# EAGLE board DUE_MUSICAL_ROBOTS (EAGLE 6.1)
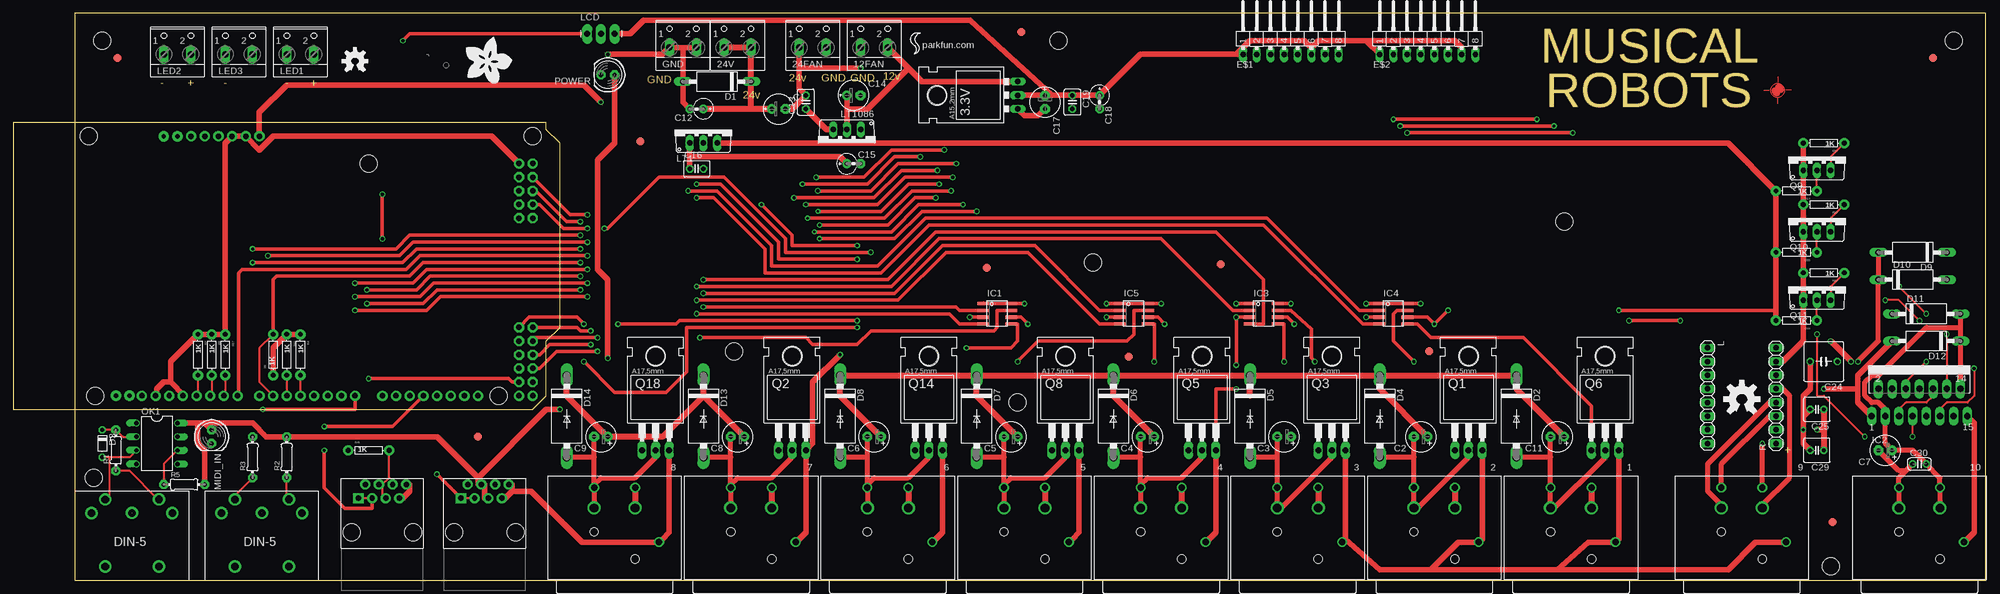
[diagram p0: board, top side]
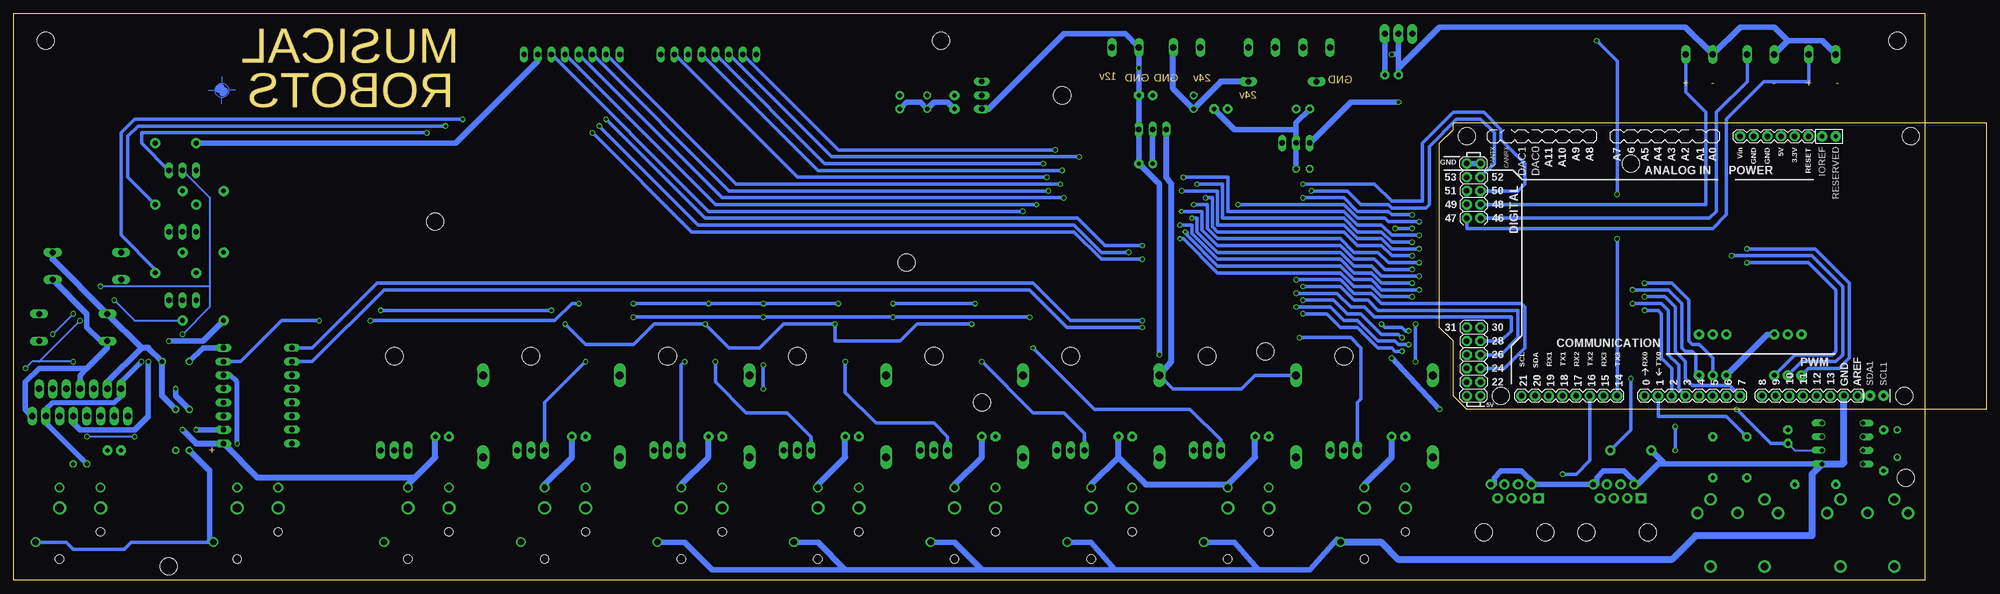
[diagram p1: board, bottom side, seen from below]

Size 366.71 x 105.4 mm. Coordinates in mm from the lower left corner, seen from the top.
Outline: 366.7,0 366.7,105.4 11.43,105.4 11.43,0 366.71,0
Copper layers (1*16): Top 0.035mm / dielectric 1.5mm / Bottom 0.035mm
Design rules: minimum track width 10mil, minimum drill 24mil, track to track 8mil, track to pad 8mil, pad to pad 8mil, via to via 8mil, smd to smd 8mil, copper to edge 40mil, drill to drill 8mil, minimum pad ring 10mil, minimum via ring 8mil, stop-mask expansion 4mil, vias tented up to drill 0mil, thermal gap 10mil
Net classes: 0 Signal: width 0.406 mm; 1 Power: width 1.016 mm; 2 Motor/Sol: width 0.889 mm; 3 24v: width 1.143 mm
Holes 3.2 mm at 14.92,19.05 16.51,100.33 337.82,2.54 360.68,100.33 194.31,100.33 186.69,33.02 200.66,59.05 133.99,42.55 288.29,66.67

## Footprints (pad centres in the part's own frame; a part is rotated, then mirrored left to right if it is on the bottom)
NC4FAH-0 = drill 1.2: 1 -3.81,0.55; 4 3.81,0.55; G -8.25,10.72 | drill 1.6: 2 -3.81,4.365; 3 3.81,4.365 | hole 1.6: -3.81,13.89; 3.81,8.81
78XXL = drill 1.016 long: GND 0,-3.81; IN -2.54,-3.81; OUT 2.54,-3.81 | hole 3.302: 0,11.176
W237-102 = drill 1.194 long: 1 -2.5,-1.27; 2 2.5,-1.27
E2,5-6E = drill 0.813 pad 1.778: + -1.27,0 | drill 0.813 pad 1.778 octagon: - 1.27,0
E2,5-6 = drill 0.813 pad 1.778: + -1.27,0 | drill 0.813 pad 1.778 octagon: - 1.27,0
E2,5-4R = drill 0.813 pad 1.6: + -1.27,0 | drill 0.813 pad 1.6 octagon: - 1.27,0
C025-030X050 = drill 0.813 pad 1.422 octagon: 1 -1.27,0; 2 1.27,0
C050-075X075 = drill 0.813 octagon: 1 -2.54,0; 2 2.54,0
C025-050X050 = drill 0.813 octagon: 1 -1.27,0; 2 1.27,0
C025-024X044 = drill 0.813 octagon: 1 -1.27,0; 2 1.27,0
DO15-12 = drill 1.118 long: A 6.35,0; C -6.35,0
DO201-15 = drill 1.499 long: A 7.62,0; C -7.62,0
D-5 = drill 0.813 octagon: A 2.54,0; C -2.54,0
MA08-1W = drill 1.016 long: 1 -8.89,0; 2 -6.35,0; 3 -3.81,0; 4 -1.27,0; 5 1.27,0; 6 3.81,0; 7 6.35,0; 8 8.89,0
FIDUCIAL-1.5X3 = smd 1.5 x 1.5: 1 0,0
SOIC-8 = smd 0.6 x 2.2: 1 -1.905,-2.6; 2 -0.635,-2.6; 3 0.635,-2.6; 4 1.905,-2.6; 5 1.905,2.6; 6 0.635,2.6; 7 -0.635,2.6; 8 -1.905,2.6
MULTIWATT-15 = drill 1.2 long: 1 -8.89,-7.62; 2 -7.62,-2.54; 3 -6.35,-7.62; 4 -5.08,-2.54; 5 -3.81,-7.62; 6 -2.54,-2.54; 7 -1.27,-7.62; 8 0,-2.54; 9 1.27,-7.62; 10 2.54,-2.54; 11 3.81,-7.62; 12 5.08,-2.54; 13 6.35,-7.62; 14 7.62,-2.54; 15 8.89,-7.62
RJ45-8 = drill 1 pad 1.88 square: 1 -4.445,6.35 | drill 1 pad 1.88: 2 -3.175,8.89; 3 -1.905,6.35; 4 -0.635,8.89; 5 0.635,6.35; 6 1.905,8.89; 7 3.175,6.35; 8 4.445,8.89 | hole 3.2: -5.715,0; 5.715,0
1X08 = drill 1.016 long: 1 -8.89,0; 2 -6.35,0; 3 -3.81,0; 4 -1.27,0; 5 1.27,0; 6 3.81,0; 7 6.35,0; 8 8.89,0
1X03_LONGPADS = drill 1.118 pad 1.88 long: 1 0,0; 2 2.54,0; 3 5.08,0
TO220V = drill 1.016 long: 1 -2.54,-2.54; 2 0,-2.54; 3 2.54,-2.54
LED5MM = drill 0.813 pad 1.676 octagon: A -1.27,0; K 1.27,0
DIN_5_FEMALE_SUPPORT = drill 1.4 pad 2.286: 1 0.46,3.61; 2 -7.07,3.6; 3 7.94,3.6; 4 -4.53,6.12; 5 5.47,6.13; 6 -4.53,-6.382; 7 5.478,-6.382
DIL08 = drill 0.813 offset: 1 -3.81,-3.81; 2 -1.27,-3.81; 3 1.27,-3.81; 4 3.81,-3.81; 5 3.81,3.81; 6 1.27,3.81; 7 -1.27,3.81; 8 -3.81,3.81
TO220 = drill 1.118 long: 1 -2.54,-6.35; 2 0,-6.35; 3 2.54,-6.35 | hole 3.302: 0,11.176
0204/7 = drill 0.813 pad 1.676 octagon: 1 -3.81,0; 2 3.81,0
AXIAL-0.3 = drill 0.9 pad 1.88: P$1 -3.81,0; P$2 3.81,0
ARDUINO_MEGA = drill 1.016 pad 1.88: 0 63.5,50.8; 1 60.96,50.8; 2 58.42,50.8; 3 55.88,50.8; 3.3V 35.56,2.54; 4 53.34,50.8; 5 50.8,50.8; 5V@0 38.1,2.54; 5V@1 93.98,50.8; 5V@2 96.52,50.8; 6 48.26,50.8; 7 45.72,50.8; 8 41.656,50.8; 9 39.116,50.8; 10 36.576,50.8; 11 34.036,50.8; 12 31.496,50.8; 13 28.956,50.8; 14 68.58,50.8; 15 71.12,50.8; 16 73.66,50.8; 17 76.2,50.8; 18 78.74,50.8; 19 81.28,50.8; 20 83.82,50.8; 21 86.36,50.8; AREF 23.876,50.8; GND@0 40.64,2.54; GND@1 43.18,2.54; GND@2 93.98,7.62; GND@3 96.52,7.62; GND@4 26.416,50.8; RESET 33.02,2.54; VIN 45.72,2.54 | drill 1.016 pad 1.88 octagon: 22 93.98,48.26; 23 96.52,48.26; 24 93.98,45.72; 25 96.52,45.72; 26 93.98,43.18; 27 96.52,43.18; 28 93.98,40.64; 29 96.52,40.64; 30 93.98,38.1; 31 96.52,38.1; 46 93.98,17.78; 47 96.52,17.78; 48 93.98,15.24; 49 96.52,15.24; 50 93.98,12.7; 51 96.52,12.7; 52 93.98,10.16; 53 96.52,10.16 | drill 0.8 pad 1.93: IOREF 30.48,2.54; P$2 27.94,2.54; SCL1 19.05,50.8; SDA1 21.59,50.8 | hole 3.2: 15.24,50.8; 13.97,2.54; 66.04,7.62; 90.17,50.8; 96.52,2.54

## Placement (x,y rotation side)
1  NC4FAH-0  [NC4FAH-0]  289.56,17.78 180 top
2  NC4FAH-0  [NC4FAH-0]  264.16,17.78 180 top
3  NC4FAH-0  [NC4FAH-0]  238.76,17.78 180 top
3.3V  V_REG_LD1117VXX  [78XXL]  182.88,90.17 90 top
4  NC4FAH-0  [NC4FAH-0]  213.36,17.78 180 top
5  NC4FAH-0  [NC4FAH-0]  187.96,17.78 180 top
6  NC4FAH-0  [NC4FAH-0]  162.56,17.78 180 top
7  NC4FAH-0  [NC4FAH-0]  137.16,17.78 180 top
8  NC4FAH-0  [NC4FAH-0]  111.76,17.78 180 top
9  NC4FAH-0  [NC4FAH-0]  321.31,17.78 180 top
10  NC4FAH-0  [NC4FAH-0]  354.33,17.78 180 top
12FAN  [W237-102]  160.02,100.33 0 top
24FAN  [W237-102]  148.59,100.33 0 top
24V  [W237-102]  134.62,100.33 0 top
C1  [E2,5-6E]  142.24,87.63 0 top
C2  [E2,5-6]  261.62,26.67 180 top
C3  [E2,5-6]  236.22,26.67 180 top
C4  [E2,5-6]  210.82,26.67 180 top
C5  [E2,5-6]  185.42,26.67 180 top
C6  [E2,5-6]  160.02,26.67 180 top
C7  [E2,5-6]  347.98,24.13 180 top
C8  [E2,5-6]  134.62,26.67 180 top
C9  [E2,5-6]  109.22,26.67 180 top
C11  [E2,5-6]  287.02,26.67 180 top
C12  [E2,5-4R]  127,87.63 180 top
C13  [C025-030X050]  147.32,88.9 90 top
C14  [E2,5-6E]  156.21,90.17 0 top
C15  [E2,5-4R]  156.21,77.47 0 top
C16  [C025-030X050]  127,76.52 0 top
C17  [E2,5-6E]  191.77,88.9 270 top
C18  [E2,5-4R]  201.93,88.9 270 top
C19  [C025-030X050]  196.85,88.9 270 top
C24  50uf  [C050-075X075]  336.55,40.64 180 top
C25  1uf  [C025-050X050]  335.28,31.75 180 top
C29  1uf  [C025-050X050]  335.28,24.13 180 top
C30  [C025-024X044]  354.33,21.59 0 top
D1  1N5060GP  [DO15-12]  130.81,92.71 180 top
D2  1N5400  [DO201-15]  279.4,30.48 270 top
D3  1N4004  [D-5]  16.51,25.4 270 top
D4  1N5400  [DO201-15]  254,30.48 270 top
D5  1N5400  [DO201-15]  229.87,30.48 270 top
D6  1N5400  [DO201-15]  204.47,30.48 270 top
D7  1N5400  [DO201-15]  179.07,30.48 270 top
D8  1N5400  [DO201-15]  153.67,30.48 270 top
D9  1N5060GP  [DO15-12]  353.06,60.96 180 top
D10  1N5060GP  [DO15-12]  353.06,55.88 0 top
D11  1N5060GP  [DO15-12]  355.6,49.53 0 top
D12  1N5060GP  [DO15-12]  355.6,44.45 180 top
D13  1N5400  [DO201-15]  128.27,30.48 270 top
D14  1N5400  [DO201-15]  102.87,30.48 270 top
E$1  [MA08-1W]  237.49,97.79 0 top
E$2  [MA08-1W]  262.89,97.79 0 top
E$3  [LOGO]  73.03,95.25 0 top
E$4  [PASS-ROUND]  327.98,91.12 0 top
E$5  [FIDUCIAL-1.5X3]  356.87,97.16 0 top
E$6  [FIDUCIAL-1.5X3]  338.14,10.79 0 top
E$7  [FIDUCIAL-1.5X3]  19.37,97.16 0 top
E$8  [FIDUCIAL-1.5X3]  86.36,26.67 0 top
E$9  [FIDUCIAL-1.5X3]  180.97,58.1 0 top
E$10  [FIDUCIAL-1.5X3]  207.33,41.59 0 top
E$11  [FIDUCIAL-1.5X3]  224.47,58.74 0 top
E$12  [FIDUCIAL-1.5X3]  263.21,42.55 0 top
E$13  [FIDUCIAL-1.5X3]  116.52,81.6 0 top
E$14  [FIDUCIAL-1.5X3]  187.33,101.92 0 top
E$15  [OSHW-LOGO-L]  321.31,33.66 0 top
E$18  [ADAFRUIT450MIL]  84.14,92.39 0 top
GND  [W237-102]  124.46,100.33 0 top
IC1  UCC27524  [SOIC-8]  182.88,49.53 270 top
IC2  L298  [MULTIWATT-15]  354.33,38.1 0 top
IC3  UCC27524  [SOIC-8]  232.41,49.53 270 top
IC4  UCC27524  [SOIC-8]  256.54,49.53 270 top
IC5  UCC27524  [SOIC-8]  208.28,49.53 270 top
IN  RJ45-8PTH  [RJ45-8]  68.58,8.89 0 top
JP5  LOGO-SFEM  [SFE-LOGO]  167.64,97.79 0 top
L  [1X08]  314.96,34.29 270 top
LCD  [1X03_LONGPADS]  106.68,101.6 0 top
LED1  [W237-102]  53.34,99.06 0 top
LED2  [W237-102]  30.48,99.06 0 top
LED3  [W237-102]  41.91,99.06 0 top
LT1  5V REG  [TO220V]  128.27,83.82 0 top
LT1086  12V REG  [TO220V]  154.94,81.28 180 top
MIDI_IN  [LED5MM]  36.83,26.67 270 top
MIN  MIDI_CONN_FEMALE_SUPPORT  [DIN_5_FEMALE_SUPPORT]  21.59,8.89 0 top
MOUT  MIDI_CONN_FEMALE_SUPPORT  [DIN_5_FEMALE_SUPPORT]  45.72,8.89 0 top
OK1  6N138  [DIL08]  26.67,25.4 270 top
OUT  RJ45-8PTH  [RJ45-8]  87.63,8.89 0 top
POWER  [LED5MM]  110.49,93.98 180 top
Q1  IRF540  [TO220]  270.51,30.48 0 top
Q2  IRF540  [TO220]  144.78,30.48 0 top
Q3  IRF540  [TO220]  245.11,30.48 0 top
Q5  IRF540  [TO220]  220.98,30.48 0 top
Q6  IRF540  [TO220]  295.91,30.48 0 top
Q8  IRF540  [TO220]  195.58,30.48 0 top
Q9  [TO220V]  335.28,78.74 0 top
Q10  [TO220V]  335.28,67.31 0 top
Q11  [TO220V]  335.28,54.61 0 top
Q14  IRF540  [TO220]  170.18,30.48 0 top
Q18  IRF540  [TO220]  119.38,30.48 0 top
R  [1X08]  327.66,34.29 90 top
R1  220  [0204/7]  19.05,24.13 90 top
R2  47  [0204/7]  50.8,22.86 90 top
R3  47  [0204/7]  44.45,22.86 90 top
R4  1K  [AXIAL-0.3]  53.34,41.91 270 top
R5  100  [0204/7]  31.75,17.78 0 top
R7  1K  [AXIAL-0.3]  34.29,41.91 270 top
R8  1K  [AXIAL-0.3]  36.83,41.91 270 top
R9  1K  [AXIAL-0.3]  48.26,41.91 90 top
R10  1K  [AXIAL-0.3]  50.8,41.91 270 top
R11  1K  [AXIAL-0.3]  336.55,81.28 180 top
R12  1K  [AXIAL-0.3]  336.55,69.85 180 top
R13  1K  [AXIAL-0.3]  336.55,57.15 180 top
R14  1K  [AXIAL-0.3]  331.47,72.39 180 top
R15  1K  [AXIAL-0.3]  331.47,60.96 180 top
R16  1K  [AXIAL-0.3]  331.47,48.26 180 top
R17  1K  [AXIAL-0.3]  39.37,41.91 270 top
R41  1K  [AXIAL-0.3]  66.04,24.13 0 top
U1  ARDUINO-MEGAFULL  [ARDUINO_MEGA]  0,85.09 180 bottom
U$3  OSHW-LOGOM  [OSHW-LOGO-M]  63.5,96.52 0 top

## Library data of the parts
1-10 = con-neutrik_ag; MPN: NC4FAH-0; OC_FARNELL: unknown; OC_NEWARK: 45K1611
3.3V IN JP5 LCD OUT U1 U$3 = Due
12FAN 24FAN 24V GND LED1-LED3 = con-wago-500; MPN: 237-102; OC_FARNELL: unknown; OC_NEWARK: 70K9898
C1-C9 C11-C19 C25 C29 E$18 MIDI_IN POWER Q9-Q11 R1-R3 R5 = adafruit
C24 C30 = rcl
D1-D14 = diode
E$1 E$2 = con-lstb
E$3 = atmel
E$4 = marks
E$5-E$15 = SparkFun-Aesthetics
IC1 IC3-IC5 = dp_devices
IC2 = st-microelectronics; MPN: L298N; OC_FARNELL: 1589425; OC_NEWARK: 32M1527
L R = pinhead
LT1 LT1086 = linear
MIN MOUT = SparkFun-Connectors
OK1 = optocoupler; MF: VISHAY/TELEFUNKEN; MPN: 6N138; OC_FARNELL: 9860150; OC_NEWARK: 35K5294
Q1-Q3 Q5 Q6 Q8 Q14 Q18 = transistor-fet
R4 R7-R17 R41 = SparkFun

## Nets
+3V3 [Power]: 3.3V.GND C17.+ C18.+ C19.1 E$1.1 E$1.6 E$2.1 E$2.7 LCD.3 MIDI_IN.A OK1.8 OUT.4 OUT.5 POWER.A Q9.1 Q10.1 Q11.1 R2.2 R5.2 R11.P$2 R12.P$2 R13.P$2 R.7
+5V [Power]: IC2.9 LT1.3 R14.P$2 R15.P$2 R16.P$2
+12V [Power]: 3.3V.OUT 12FAN.2 C14.+ C15.+ C16.1 LT1.1 LT1086.2 U1.VIN
+24V [24v]: 1.1 1.2 2.1 2.2 4.1 4.2 5.1 5.2 6.1 6.2 7.1 7.2 8.1 8.2 24FAN.2 24V.1 24V.2 C1.+ C2.+ C4.+ C5.+ C6.+ C8.+ C9.+ C11.+ C12.+ C13.1 C24.1 C25.1 C29.1 D1.C D2.C D4.C D5.C D6.C D7.C D8.C D9.C D11.C D13.C D14.C IC2.4 LT1086.3 R.1
DIGITALBUS8: U1.52
DIGITALBUS9: Q11.3 R13.P$1 U1.51
DIGITALBUS11: Q9.3 R11.P$1 U1.50
GND [Power]: 1.G 2.G 3.3V.IN 3.G 4.G 5.G 6.G 7.G 8.G 9.G 10.G 12FAN.1 24FAN.1 C1.- C12.- C13.2 C14.- C15.- C16.2 C17.- C18.- C19.2 C24.2 C25.2 C29.2 D1.A D10.A D12.A GND.1 GND.2 IC2.1 IC2.8 IC2.15 IC3.3 IN.2 IN.7 IN.8 LCD.2 LED1.1 LED2.1 LED3.1 LT1.2 LT1086.1 OK1.5 OUT.2 OUT.7 OUT.8 POWER.K Q1.3 Q3.3 Q5.3 Q6.3 Q8.3 Q14.3 Q18.3 R4.P$1 R7.P$1 R8.P$1 R9.P$1 R10.P$1 R17.P$1 R41.P$1 R.2 R.8 U1.12 U1.GND@0 U1.GND@1 U1.GND@2 U1.GND@3 U1.GND@4
MIDIIN: MIDI_IN.K OK1.6 R5.1 U1.0
MIDIOUT: R3.2 U1.1
N$1: MIN.5 R1.1
N$2: D3.C OK1.2 R1.2
N$3 [Motor/Sol]: 2.3 2.4 C2.- D4.A Q1.2
N$5: D3.A MIN.4 OK1.3
N$6: MOUT.5 R2.1
N$7 [Motor/Sol]: 10.1 10.2 C7.+ C30.2 D11.A D12.C IC2.3 IC2.14
N$8: MOUT.4 R3.1
N$9: OUT.1 OUT.3 U1.16
N$10: IN.1 IN.3 U1.17
N$13 [Motor/Sol]: 3.3 3.4 C3.- D5.A Q3.2
N$14: IN.4 IN.5 R41.P$2 U1.22
N$16 [Motor/Sol]: 1.3 1.4 C11.- D2.A Q6.2
N$17: E$2.6 U1.2
N$18: IC2.7 IC2.12 Q9.2 R14.P$1
N$19: E$2.3 R4.P$2 U1.4
N$20: LCD.1 U1.14
N$21: E$1.7 R9.P$2 U1.6
N$22 [Motor/Sol]: 9.1 R.6
N$23 [Motor/Sol]: 9.3 R.4
N$25: Q10.3 R12.P$1 U1.49
N$26 [Motor/Sol]: 9.4 R.3
N$27 [Motor/Sol]: 9.2 R.5
N$28 [Motor/Sol]: 10.3 10.4 C7.- C30.1 D9.A D10.C IC2.2 IC2.13
N$30: IC2.6 IC2.11 Q11.2 R16.P$1
N$31: IC2.5 IC2.10
N$32: E$1.2 R7.P$2 U1.11
N$33: E$2.4 U1.7
N$34: E$1.5 U1.8
N$35: E$1.3 R8.P$2 U1.10
N$40 [Motor/Sol]: 4.3 4.4 C4.- D6.A Q5.2
N$43: Q10.2 R15.P$1
N$44 [Motor/Sol]: 5.3 5.4 C5.- D7.A Q8.2
N$47 [Motor/Sol]: 6.3 6.4 C6.- D8.A Q14.2
N$50 [Motor/Sol]: 7.3 7.4 C8.- D13.A
N$53 [Motor/Sol]: 8.3 8.4 C9.- D14.A Q18.2
N$57: U1.25
N$59: LED1.2 U1.48
N$60: LED2.2 U1.47
N$61: LED3.2 U1.46
S$1: E$1.4 R17.P$2 U1.9
S$3: Q18.1
S$4: U1.53
S$5: U1.24
S$7: U1.26
S$8: U1.29
S$9: Q14.1
S$10: Q8.1
S$11: L.1 U1.31
S$12: Q5.1
S$13: Q3.1
S$14: U1.28
S$15 [Power]: IC1.1
S$16: U1.27
S$17: L.2 U1.30
S$18 [Power]: IC1.3
S$19: Q1.1
S$20: Q6.1
S$21: E$2.2 R10.P$2 U1.5
S$22 [24v]: 3.1 3.2 C3.+
S$25: E$2.5 U1.3

## Tracks (layer width: path | path; a pad name or v marks a point on that pad's centre or on a via)
+3V3  (via drill 0.6 pad 0.81, 0.61)
  Top 0.61: v300.36,48.26 v309.88,48.26 | v251.46,51.44 v261.62,51.44 | 234.31,51.44 v237.49,51.44 | 179.71,51.44 v187.96,51.44 | v213.36,51.44 v203.2,51.44 | v227.33,51.44 230.5,51.44
  Top 1.016: R11.P$2 Q9.1 R12.P$2 Q10.1 R13.P$2 Q11.1 332.74,44.45 328.93,40.64 R.7 | 241.3,99.06 242.57,100.33 251.46,100.33 | E$2.1 251.46,100.33 | E$2.7 269.24,99.06 267.97,100.33 251.46,100.33 | 227.33,97.79 209.55,97.79 C18.+ C19.1 193.04,90.17 | 227.33,97.79 E$1.1 | 241.3,99.06 240.03,100.33 229.87,100.33 227.33,97.79 | 241.3,99.06 E$1.6 | OUT.5 87.63,15.24 87.63,17.78 OUT.4 86.36,17.78 86.36,19.05 | 35.56,29.21 34.29,29.21 | 34.29,29.21 OK1.8 | MIDI_IN.A 35.56,29.21 | R5.2 35.56,24.13 34.29,25.4 34.29,29.21 | 35.56,29.21 44.45,29.21 46.99,26.67 R2.2 78.74,26.67 86.36,19.05 | 193.04,90.17 C17.+ 3.3V.GND | LCD.3 114.62,101.6 117.16,104.14 177.8,104.14 193.04,90.17 | 86.36,19.05 99.06,31.75 v101.6,31.75 | POWER.A 111.76,81.28 108.59,78.11 108.59,57.78 110.49,55.88 v110.49,41.27
  Bottom 0.61: R.7 324.49,40.64 316.87,48.26 v309.88,48.26 | v300.36,48.26 266.06,48.26 262.89,51.44 v261.62,51.44 | v251.46,51.44 v237.49,51.44 v227.33,51.44 v213.36,51.44 | v187.96,51.44 v203.2,51.44
  Bottom 1.016: R11.P$2 284.48,81.28 269.24,96.52 E$2.7 | LCD.3 POWER.A | v110.49,41.27 v101.6,31.75
+5V  (via drill 0.6 pad 0.81, 0.61)
  Top 0.61: 327.66,50.16 v298.45,50.16 | 258.44,48.9 262.89,48.9 v264.16,47.62 v266.7,50.16 | 234.31,48.9 236.86,48.9 v238.12,47.62 | 210.19,48.9 212.72,48.9 v214,47.62 | 184.78,48.9 187.33,48.9 v188.59,47.62
  Top 1.016: v337.82,44.45 v341.63,40.64 | LT1.3 318.77,81.28 R14.P$2 R15.P$2 327.66,50.16 R16.P$2
  Bottom 0.61: v298.45,50.16 v266.7,50.16 | v264.16,47.62 260.35,43.81 251.46,43.81 247.65,47.62 v238.12,47.62 233.68,43.18 227.97,43.18 223.52,47.62 v214,47.62 214,44.45 201.93,44.45 198.75,47.62 v188.59,47.62
  Bottom 1.016: IC2.9 355.6,29.21 354.33,27.94 344.17,27.94 341.63,30.48 v341.63,40.64 | v337.82,44.45 331.47,44.45 R16.P$2
+12V  (via drill 0.6 pad 0.81)
  Top 1.016: 3.3V.OUT 168.91,92.71 166.37,95.25 | 166.37,95.25 162.56,99.06 12FAN.2 | LT1.1 125.73,78.74 | 125.73,78.74 C16.1 | C14.+ 154.94,87.63 | 154.94,87.63 LT1086.2 | 125.73,78.74 153.67,78.74 C15.+ | 166.37,95.25 158.75,87.63 154.94,87.63 | U1.VIN 45.72,87 50.8,92.08 106.04,92.08 v109.22,88.9
  Bottom 1.016: LT1086.2 C15.+ | v109.22,88.9 118.11,88.9 LT1.1
+24V  (via drill 0.61)
  Top 1.143: C25.1 336.55,27.94 | 336.55,27.94 C29.1 | 336.55,27.94 v335.28,27.94 | D14.C 102.87,34.29 C9.+ 120.65,26.67 128.27,34.29 | 8.1 8.2 | 128.27,34.29 D13.C | C8.+ 128.27,34.29 | 7.1 7.2 | C11.+ 279.4,35.56 D2.C D4.C | 1.1 1.2 | D4.C 254,35.56 C2.+ | 2.1 2.2 | 229.87,34.29 D5.C | D6.C 204.47,34.29 C4.+ | 4.1 4.2 | D7.C 179.07,34.29 C5.+ | 5.1 5.2 | C13.1 151.13,83.82 LT1086.3 | 132.08,99.06 24V.1 24V.2 137.16,99.06 D1.C 137.16,87.63 | C1.+ 137.16,87.63 | 137.16,87.63 C12.+ | C6.+ 153.67,34.29 D8.C D7.C | 6.1 6.2 | D7.C D6.C | D6.C D5.C | D5.C D4.C
  Bottom 0.61: D13.C 135.89,38.1 138.43,35.56 151.13,35.56 D8.C
  Bottom 1.143: D9.C 359.41,59.69 D11.C 342.9,43.18 | C25.1 339.09,34.29 C24.1 341.63,43.18 342.9,43.18 | v335.28,27.94 332.74,25.4 R.1 321.31,19.05 292.1,19.05 | IC2.4 349.25,36.83 342.9,43.18 | C9.+ 110.49,22.86 115.57,17.78 8.1 | C8.+ 135.89,22.86 140.97,17.78 | C11.+ 288.29,22.86 292.1,19.05 | 292.1,19.05 293.37,17.78 1.1 | C2.+ 262.89,22.86 267.97,17.78 2.1 | C4.+ 212.09,22.86 217.17,17.78 4.1 | C5.+ 186.69,22.86 191.77,17.78 5.1 | 24FAN.2 151.13,99.06 151.13,91.44 C13.1 142.24,92.71 D1.C | 161.29,22.86 C6.+ | 161.29,22.86 166.37,17.78 6.1 | LT1086.3 152.4,74.93 151.45,73.66 151.45,40.64 D8.C | 140.97,17.78 156.21,17.78 161.29,22.86 | 140.97,17.78 7.1
DIGITALBUS8  (via drill 0.6 pad 0.81)
  Top 0.61: v125.41,72.39 130.81,72.39 140.97,62.23 140.97,58.42 160.66,58.42 169.55,67.31 233.05,67.31 250.19,50.16 254,50.16
  Bottom 0.61: U1.52 91.44,77.47 91.44,83.19 93.98,85.72 98.43,85.72 103.5,80.64 103.5,69.85 104.14,69.22 110.49,69.22 111.12,69.85 116.21,69.85 118.75,72.39 v125.41,72.39
DIGITALBUS9  (via drill 0.6 pad 0.81)
  Top 0.406: Q11.3 337.82,54.61 R13.P$1
  Top 0.61: v283.21,85.72 v256.54,85.72 | v156.84,62.23 144.78,62.23 144.78,64.14 v139.06,69.85 | v105.41,66.67 102.87,66.67 97.16,72.39 U1.51
  Bottom 0.61: R13.P$1 340.36,57.78 346.71,64.14 346.71,83.19 344.17,85.72 v283.21,85.72 | v256.54,85.72 238.12,67.31 168.91,67.31 163.83,62.23 v156.84,62.23 | v139.06,69.85 119.38,69.85 116.84,67.31 111.76,67.31 111.12,66.67 v105.41,66.67
DIGITALBUS11  (via drill 0.6 pad 0.81)
  Top 0.406: Q9.3 337.82,78.74 R11.P$1
  Top 0.61: v127,73.66 131.44,73.66 142.24,62.87 142.24,59.69 v156.84,59.69 | v289.88,83.19 v259.08,83.19
  Bottom 0.61: Q9.3 342.9,81.28 342.9,83.19 v289.88,83.19 | U1.50 87,72.39 85.72,73.66 85.72,77.47 90.17,81.92 90.17,83.82 93.34,87 99.06,87 104.78,81.28 104.78,70.48 110.49,70.48 113.66,73.66 v127,73.66 | v259.08,83.19 240.67,64.77 169.55,64.77 164.47,59.69 v156.84,59.69
GND  (via drill 0.6 pad 0.81, 0.61)  (1 unrouted)
  Top 0.61: Q5.3 223.52,35.56 v227.33,35.56 | v227.33,40.01 v227.33,48.9 IC3.3 | v177.8,48.9 180.34,48.9 | 253.37,48.9 v251.46,48.9 | v203.2,48.9 206.38,48.9
  Top 1.016: C1.- 144.78,87.63 C13.2 146.05,91.44 146.05,95.25 | 146.05,95.25 146.05,99.06 24FAN.1 | 3.3V.IN 187.96,86.36 190.5,86.36 C17.- | v157.48,95.25 146.05,95.25 | 124.46,99.06 GND.2 127,99.06 | 124.46,99.06 GND.1 121.92,99.06 120.65,97.79 v110.49,97.79 | C12.- 124.46,88.9 D1.A 124.46,99.06 | C29.2 332.74,25.4 v332.74,27.94 332.74,30.48 | C25.2 332.74,30.48 | C24.2 334.01,35.56 332.74,34.29 332.74,30.48 | IC2.15 364.49,29.21 364.49,8.89 363.22,7.62 10.G | D12.A 342.9,38.1 342.9,35.56 | 342.9,35.56 342.9,33.02 IC2.1 | 342.9,35.56 v336.55,35.56 | Q6.3 298.45,7.62 1.G 292.74,6.99 287.02,1.91 | 247.65,7.62 Q3.3 | Q1.3 273.05,7.62 2.G 268.61,6.99 263.52,1.91 | 247.65,7.62 254,1.91 263.52,1.91 | 247.65,7.62 3.G | 263.52,1.91 287.02,1.91 | 92.71,16.51 91.44,15.24 OUT.7 | 92.71,16.51 92.71,17.78 OUT.8 | IN.7 72.39,15.24 73.66,16.51 73.66,17.78 IN.8 | Q5.3 223.52,8.89 222.25,7.62 4.G | Q8.3 198.12,8.89 196.85,7.62 5.G | Q14.3 172.72,8.89 171.45,7.62 6.G | Q18.3 121.92,8.89 120.65,7.62 8.G 119.38,6.99 105.73,6.99 96.2,16.51 92.71,16.51 | 7.G 146.05,7.62 147.32,8.89 147.32,24.13 148.59,25.4 148.59,36.83 v153.67,41.91 | 287.02,1.91 318.77,1.91 323.85,6.99 9.G | R9.P$1 48.26,43.18 R10.P$1 R4.P$1 | 29.21,36.83 27.94,36.83 26.67,35.56 26.67,34.29 U1.GND@4 | 29.21,36.83 31.75,34.29 U1.12 | U1.GND@2 88.9,82.55 48.26,82.55 45.72,80.01 U1.GND@1 U1.GND@0 39.37,81.28 R17.P$1 R8.P$1 R7.P$1 29.21,40.64 29.21,36.83
  Bottom 0.61: v227.33,35.56 v227.33,40.01 | v251.46,48.9 v227.33,48.9 v203.2,48.9 v177.8,48.9 | 329.56,6.99 344.81,6.99 346.07,5.71 355.6,5.71 356.87,6.99 362.58,6.99
  Bottom 1.016: C17.- 193.04,88.9 195.58,88.9 C19.2 198.12,88.9 200.66,88.9 C18.- | 157.48,99.06 v157.48,95.25 C14.- LT1086.1 C15.- 153.67,73.66 v153.67,41.91 | 3.3V.IN 185.42,87.63 171.45,101.6 160.02,101.6 157.48,99.06 | 157.48,99.06 12FAN.1 | 36.83,100.33 30.48,100.33 27.94,97.79 LED2.1 | 36.83,100.33 39.37,97.79 LED3.1 | 50.8,97.79 45.72,102.87 39.37,102.87 36.83,100.33 | LCD.2 109.22,97.79 | 109.22,97.79 109.22,95.25 | 109.22,95.25 POWER.K | C16.2 LT1.2 128.27,83.82 | 128.27,83.82 128.27,85.09 C12.- | v110.49,97.79 109.22,97.79 | 50.8,97.79 55.88,102.87 101.6,102.87 109.22,95.25 | 50.8,97.79 LED1.1 | C1.- 139.7,83.82 128.27,83.82 | v332.74,27.94 R.2 | R.8 331.47,43.18 C24.2 | C29.2 330.2,20.32 330.2,7.62 9.G | D10.A 353.06,49.53 353.06,46.99 350.52,44.45 D12.A 349.25,43.18 353.06,39.37 | IC2.8 354.33,38.1 353.06,39.37 | IC2.15 364.49,31.75 364.49,36.83 361.95,39.37 353.06,39.37 | C25.2 336.55,34.29 v336.55,35.56 | 83.82,17.78 IN.8 72.39,17.78 72.39,19.05 71.12,20.32 67.31,20.32 64.77,17.78 | 83.82,17.78 86.36,20.32 90.17,20.32 91.44,19.05 91.44,17.78 OUT.8 | 83.82,17.78 OUT.2 | 59.69,21.59 OK1.5 | R41.P$1 59.69,21.59 | 64.77,17.78 60.96,21.59 59.69,21.59 | 64.77,17.78 IN.2 | 135.25,1.91 125.73,1.91 120.65,7.62 8.G | 135.25,1.91 139.7,6.99 7.G | 161.93,1.91 166.37,6.99 6.G | 135.25,1.91 161.93,1.91 | 186.69,1.91 191.77,6.99 5.G | 161.93,1.91 186.69,1.91 | 212.09,1.91 217.17,6.99 4.G | 186.69,1.91 212.09,1.91 | 212.09,1.91 236.86,1.91 241.94,6.99 3.G | U1.GND@3 U1.GND@2 | R9.P$1 40.64,45.72 R17.P$1
  Bottom 1.27: U1.GND@4 26.42,21.84 26.67,21.59 OK1.5 32.38,19.68 32.38,8.26 53.98,8.26 58.42,3.81 109.22,3.81 112.4,6.99 120.01,6.99
MIDIIN  (via drill 0.6 pad 0.81)
  Top 0.406: R5.1 27.94,21.59 OK1.6
  Top 0.61: U1.0 63.5,31.75 v46.35,31.75
  Bottom 0.406: OK1.6 35.56,24.13 MIDI_IN.K
  Bottom 0.61: v46.35,31.75 40,25.4 MIDI_IN.K
MIDIOUT
  Bottom 0.61: U1.1 60.96,30.48 48.26,30.48 R3.2
N$1
  Top 0.406: R1.1 21.59,20.32 26.67,15.24 MIN.5
N$2
  Top 0.406: D3.C R1.2 20.32,26.67 OK1.2
N$3
  Top 0.889: 260.35,22.86 2.4 2.3 260.35,12.7 270.51,22.86 Q1.2 | 260.35,22.86 C2.- | 260.35,22.86 D4.A
N$5
  Top 0.406: 17.78,22.86 21.59,22.86 OK1.3 | 17.78,22.86 D3.A | 17.78,22.86 17.78,15.24 MIN.4
N$6
  Top 0.406: R2.1 50.8,15.24 MOUT.5
N$7
  Top 0.889: D11.A 361.95,46.99 | 361.95,46.99 D12.C IC2.14 | 10.2 10.1 358.14,19.05 C30.2 353.06,24.13 C7.+ 347.98,25.4 IC2.3 347.98,31.75 346.71,33.02 345.44,33.02 344.17,34.29 344.17,36.83 345.44,38.1 346.71,38.1 355.6,46.99 361.95,46.99
N$8
  Top 0.406: R3.1 40.64,15.24 MOUT.4
N$9  (via drill 0.6 pad 0.81)
  Top 0.406: OUT.3 83.82,15.24
  Top 0.61: v78.74,19.68 OUT.1 83.82,15.24
  Bottom 0.61: U1.16 73.66,22.23 76.2,19.68 v78.74,19.68
N$10  (via drill 0.6 pad 0.81)
  Top 0.406: IN.3 IN.1
  Top 0.61: IN.3 66.67,13.34 61.59,13.34 57.78,17.14 v57.78,24.13 | U1.17 70.48,28.57 v57.78,28.57
  Bottom 0.61: v57.78,28.57 v57.78,24.13
N$13
  Top 0.889: 234.95,22.86 3.4 3.3 234.95,12.7 245.11,22.86 Q3.2 | 234.95,22.86 C3.- | 234.95,22.86 D5.A
N$14  (via drill 0.6 pad 0.81)
  Top 0.406: 68.58,17.78 68.58,15.24 IN.5 | R41.P$2 69.85,19.05 68.58,17.78 | 68.58,17.78 IN.4
  Top 0.61: v66.04,37.47 92.07,37.47 92.71,36.83 U1.22
  Bottom 0.61: R41.P$2 66.04,27.94 v66.04,37.47
N$16
  Top 0.889: 285.75,22.86 1.4 1.3 285.75,12.7 295.91,22.86 Q6.2 | 285.75,22.86 C11.- | 285.75,22.86 D2.A
N$17  (via drill 0.5 pad 0.25, 0.6 pad 0.81)
  Top 0.61: v149.86,63.5 163.83,63.5 168.91,68.58 v179.07,68.58 | v106.68,52.7 79.38,52.7 76.84,50.16 v63.5,50.16
  Bottom 0.61: v179.07,68.58 237.49,68.58 E$2.6 | v149.86,63.5 149.22,63.5 142.88,57.15 120.01,57.15 117.47,54.61 114.3,54.61 112.4,52.7 v106.68,52.7 | v63.5,50.16 60.96,50.16 60.33,49.53 60.33,41.27 58.42,39.37 U1.2
N$18  (via drill 0.61)
  Top 0.406: R14.P$1 Q9.2 | v353.06,26.67 IC2.7 | v344.17,26.67 336.55,34.29 335.28,34.29 v335.28,45.72 | v359.41,45.72 IC2.12 | v350.52,54.61 v355.6,49.53
  Bottom 0.406: v344.17,26.67 v353.06,26.67 | v335.28,45.72 330.2,50.8 330.2,54.61 | 330.2,54.61 330.2,71.12 Q9.2 | v355.6,49.53 v359.41,45.72 | 330.2,54.61 v350.52,54.61
N$19  (via drill 0.5 pad 0.25, 0.6 pad 0.81)
  Top 0.406: R4.P$2 U1.4
  Top 0.61: v147.64,67.31 161.93,67.31 167,72.39 v174.31,72.39 | v105.41,56.52 77.47,56.52 74.93,53.98 v65.72,53.98
  Bottom 0.61: v174.31,72.39 233.68,72.39 E$2.3 | v147.64,67.31 146.69,67.31 146.69,64.77 142.88,60.96 120.01,60.96 117.47,58.42 114.3,58.42 112.4,56.52 v105.41,56.52 | v65.72,53.98 59.05,53.98 56.52,51.44 56.52,43.18 55.88,42.55 54.61,42.55 53.98,41.91 53.98,38.73 R4.P$2
N$20  (via drill 0.6 pad 0.81)
  Top 0.61: v68.58,63.5 v68.58,71.75 | v72.39,100.33 73.66,101.6 LCD.1
  Bottom 0.61: U1.14 v68.58,63.5 | v68.58,71.75 68.58,96.52 v72.39,100.33
N$21  (via drill 0.6 pad 0.81)
  Top 0.406: U1.6 45.72,36.83 45.72,43.18 R9.P$2
  Top 0.61: R9.P$2 48.26,55.88 48.9,56.52 73.66,56.52 76.2,59.05 v105.41,59.05 | v147.32,69.85 160.66,69.85 165.74,74.93 v174.62,74.93
  Bottom 0.61: v105.41,59.05 111.12,59.05 113.03,60.96 117.47,60.96 120.01,63.5 142.88,63.5 144.78,65.41 144.78,69.85 v147.32,69.85 | v174.62,74.93 220.98,74.93 E$1.7
N$22  (via drill 0.61)
  Top 0.889: 9.1 v325.12,25.4
  Bottom 0.889: R.6 326.39,38.1 325.12,36.83 v325.12,25.4
N$23
  Top 0.889: R.4 326.39,33.02 314.96,21.59 314.96,16.51 317.5,13.97 9.3
N$25  (via drill 0.6 pad 0.81)
  Top 0.406: Q10.3 337.82,67.31 R12.P$1
  Top 0.61: U1.49 97.79,69.85 102.24,65.41 v106.68,65.41 | v109.85,65.41 110.49,65.41 120.01,74.93 132.08,74.93 143.51,63.5 143.51,60.96 v159.39,60.96 | v286.38,84.45 v257.81,84.45
  Bottom 0.61: v106.68,65.41 v109.85,65.41 | R12.P$1 345.44,74.93 345.44,82.55 343.54,84.45 v286.38,84.45 | v159.39,60.96 164.47,60.96 169.55,66.04 239.4,66.04 v257.81,84.45
N$26
  Top 0.889: R.3 326.39,30.48 317.5,21.59 9.4
N$27
  Top 0.889: R.5 328.93,35.56 330.2,34.29 330.2,19.05 325.12,13.97 9.2
N$28  (via drill 0.61)
  Top 0.889: D9.A D10.C 346.71,44.45 v342.9,40.64 | 351.79,20.32 350.52,19.05 10.4 10.3 | 351.79,20.32 C30.1 | C7.- 350.52,20.32 351.79,20.32
  Bottom 0.889: C30.1 360.68,29.21 IC2.13 360.68,31.75 359.41,33.02 347.98,33.02 346.71,34.29 IC2.2 346.71,36.83 v342.9,40.64
N$30  (via drill 0.61)
  Top 0.406: R16.P$1 Q11.2 | IC2.11 358.14,31.75 359.41,33.02 363.22,33.02 364.49,34.29 v364.49,39.37 | v355.6,40.64 351.79,36.83 IC2.6 | v347.98,52.07 350.52,52.07 v354.33,48.26
  Bottom 0.406: v364.49,39.37 363.22,40.64 361.95,40.64 | v355.6,40.64 361.95,40.64 | R16.P$1 344.17,48.26 v347.98,52.07 | 361.95,40.64 v354.33,48.26
N$31
  Top 0.406: IC2.5 350.52,31.75 351.79,33.02 355.6,33.02 356.87,34.29 IC2.10
N$32  (via drill 0.6 pad 0.81)
  Top 0.406: R7.P$2 34.29,34.29 U1.11
  Top 0.61: v44.45,61.59 71.12,61.59 73.66,64.14 v105.41,64.14 | v149.22,74.93 158.12,74.93 163.19,80.01 v173.04,80.01
  Bottom 0.61: R7.P$2 33.02,39.37 27.3,39.37 25.4,41.27 25.4,55.24 31.75,61.59 v44.45,61.59 | v105.41,64.14 110.49,64.14 112.4,66.04 116.84,66.04 119.38,68.58 140.97,68.58 140.97,74.93 v149.22,74.93 | v173.04,80.01 213.36,80.01 E$1.2
N$33  (via drill 0.5 pad 0.25, 0.6 pad 0.81)
  Top 0.61: v149.86,66.04 162.56,66.04 167.64,71.12 v171.45,71.12 | v106.68,55.24 78.1,55.24 75.56,52.7 v63.5,52.7
  Bottom 0.61: v171.45,71.12 234.95,71.12 E$2.4 | v149.86,66.04 147.64,66.04 147.64,64.45 142.88,59.69 120.01,59.69 117.47,57.15 114.3,57.15 112.4,55.24 v106.68,55.24 | v63.5,52.7 59.69,52.7 57.78,50.8 57.78,42.55 55.88,40.64 55.88,37.47 54.61,36.2 47.62,36.2 U1.7
N$34  (via drill 0.6 pad 0.81)
  Top 0.61: U1.8 41.91,34.54 41.91,57.15 42.55,57.78 73.03,57.78 75.56,60.33 v106.68,60.33 | v145.1,71.12 160.02,71.12 165.1,76.2 v171.77,76.2
  Bottom 0.61: v106.68,60.33 110.49,60.33 112.4,62.23 116.84,62.23 119.38,64.77 142.88,64.77 143.83,65.72 143.83,71.12 v145.1,71.12 | v171.77,76.2 217.17,76.2 E$1.5
N$35  (via drill 0.6 pad 0.81)
  Top 0.406: R8.P$2 36.83,34.29 U1.10
  Top 0.61: v47.31,60.33 71.75,60.33 74.3,62.87 v106.68,62.87 | v146.69,73.66 158.75,73.66 163.83,78.74 v168.59,78.74
  Bottom 0.61: R8.P$2 34.29,40.64 27.94,40.64 26.67,41.91 26.67,54.61 32.38,60.33 v47.31,60.33 | v106.68,62.87 110.49,62.87 112.4,64.77 116.84,64.77 119.38,67.31 141.92,67.31 141.92,73.66 v146.69,73.66 | v168.59,78.74 214.63,78.74 E$1.3
N$40
  Top 0.889: Q5.2 220.98,22.86 217.17,19.05 210.82,19.05 209.55,17.78 | 209.55,17.78 209.55,22.86 | 209.55,22.86 C4.- | 209.55,17.78 4.4 4.3 | 209.55,22.86 D6.A
N$43
  Top 0.406: R15.P$1 Q10.2
N$44
  Top 0.889: Q8.2 195.58,22.86 191.77,19.05 185.42,19.05 184.15,17.78 | 184.15,17.78 184.15,22.86 | 184.15,22.86 C5.- | 184.15,17.78 5.4 5.3 | 184.15,22.86 D7.A
N$47
  Top 0.889: 158.75,17.78 160.02,19.05 166.37,19.05 170.18,22.86 Q14.2 | 158.75,17.78 158.75,22.86 | 158.75,22.86 C6.- | 158.75,17.78 6.4 6.3 | 158.75,22.86 D8.A
N$50
  Top 0.889: 144.78,24.13 144.78,22.86 140.97,19.05 134.62,19.05 133.35,17.78 | 133.35,17.78 133.35,22.86 | 133.35,22.86 C8.- | 133.35,17.78 7.4 7.3 | 133.35,22.86 D13.A
N$53
  Top 0.889: Q18.2 119.38,22.86 115.57,19.05 109.22,19.05 107.95,17.78 | 107.95,17.78 107.95,22.86 | 107.95,22.86 C9.- | 107.95,17.78 8.4 8.3 | 107.95,22.86 D14.A
N$57  (via drill 0.6 pad 0.81)
  Top 0.61: U1.25 97.79,39.37 100.97,42.55 v108.59,42.55 | v127,49.53 173.99,49.53 175.9,47.62 180.34,47.62
  Bottom 0.61: v108.59,42.55 109.85,42.55 110.49,43.18 113.03,43.18 116.84,46.99 120.01,46.99 122.56,49.53 v127,49.53
N$59
  Bottom 0.61: U1.48 52.07,69.85 52.07,87 55.84,90.77 LED1.2
N$60
  Bottom 0.61: U1.47 96.52,65.41 50.8,65.41 48.26,67.94 48.26,85.72 41.27,92.71 33.02,92.71 32.98,92.75 LED2.2
N$61
  Bottom 0.61: U1.46 51.44,67.31 50.16,68.58 50.16,87 44.41,92.75 LED3.2
S$1  (via drill 0.6 pad 0.81)
  Top 0.406: R17.P$2 39.37,34.29 U1.9
  Top 0.61: v44.45,59.05 72.39,59.05 74.93,61.59 v105.41,61.59 | v149.54,72.39 159.39,72.39 164.47,77.47 v175.26,77.47
  Bottom 0.61: R17.P$2 35.56,41.91 28.57,41.91 27.94,42.55 27.94,53.98 33.02,59.05 v44.45,59.05 | v105.41,61.59 110.49,61.59 112.4,63.5 116.84,63.5 119.38,66.04 142.88,66.04 142.88,72.39 v149.54,72.39 | v175.26,77.47 215.9,77.47 E$1.4
S$3  (via drill 0.6 pad 0.81)
  Top 0.61: 185.42,50.16 182.88,50.16 182.88,46.99 182.25,46.35 159.39,46.35 156.84,43.81 148.59,43.81 147.32,45.09 v127.63,45.09
  Bottom 0.406: 116.84,25.4 Q18.1
  Bottom 0.61: v127.63,45.09 118.11,45.09 116.21,43.18 116.21,33.66 116.84,33.02 Q18.1
S$4  (via drill 0.6 pad 0.81)
  Top 0.61: 254,47.62 250.83,47.62 232.41,66.04 170.18,66.04 161.29,57.15 139.7,57.15 139.7,61.59 130.18,71.12 v127,71.12 | U1.53 103.5,67.94 v106.68,67.94
  Bottom 0.61: v127,71.12 119.38,71.12 116.84,68.58 111.12,68.58 110.49,67.94 v106.68,67.94
S$5  (via drill 0.6 pad 0.81)
  Top 0.61: 229.87,47.62 232.41,47.62 232.41,55.88 223.52,64.77 171.45,64.77 162.56,55.88 v128.27,55.88
  Bottom 0.61: U1.24 89.53,39.37 85.72,43.18 85.72,50.8 86.36,51.44 112.4,51.44 114.3,53.34 117.47,53.34 120.01,55.88 v128.27,55.88
S$6  (via drill 0.6 pad 0.81)
  Top 0.61: 184.78,47.62 186.69,47.62 186.69,44.45 185.42,43.18 v177.17,43.18
  Bottom 0.61: v177.17,43.18 165.74,31.75 147.96,31.75 142.24,26.04 142.24,24.13
S$7  (via drill 0.6 pad 0.81)
  Top 0.61: 229.87,50.16 226.69,50.16 213.36,63.5 172.09,63.5 163.19,54.61 v127,54.61
  Bottom 0.61: U1.26 90.17,41.91 87,45.09 87,50.16 113.03,50.16 114.94,52.07 117.47,52.07 120.01,54.61 v127,54.61
S$8  (via drill 0.6 pad 0.81)
  Top 0.61: 205.74,47.62 201.93,47.62 188.59,60.96 173.36,60.96 164.47,52.07 v127,52.07 | U1.29 97.16,45.09 v108.59,45.09
  Bottom 0.61: v108.59,45.09 109.22,45.72 112.4,45.72 116.21,49.53 118.75,49.53 121.28,52.07 v127,52.07
S$9  (via drill 0.6 pad 0.81)
  Top 0.61: 210.82,50.16 208.28,50.16 208.28,45.72 207.01,44.45 190.5,44.45 v186.69,40.64
  Bottom 0.61: v186.69,40.64 177.17,31.11 171.45,31.11 167.64,27.3 Q14.1
S$10  (via drill 0.6 pad 0.81)
  Top 0.61: 210.19,47.62 212.09,47.62 v212.09,40.64
  Bottom 0.61: v212.09,40.64 212.09,34.92 206.38,29.21 195.58,29.21 193.04,26.67 Q8.1
S$11  (via drill 0.6 pad 0.81)
  Top 0.61: U1.31 104.78,46.99 105.41,46.35 v107.31,46.35 | v112.4,47.62 123.19,47.62 123.82,48.26 v156.84,48.26
  Bottom 0.61: L.1 311.15,43.18 299.08,55.24 177.17,55.24 170.18,48.26 v156.84,48.26 | v107.31,46.35 107.95,46.35 108.59,46.99 111.76,46.99 v112.4,47.62
S$12  (via drill 0.6 pad 0.81)
  Top 0.61: 234.31,47.62 236.22,47.62 v236.22,40.64
  Bottom 0.61: v236.22,40.64 236.22,36.83 230.5,31.11 222.89,31.11 218.44,26.67 Q5.1
S$13  (via drill 0.6 pad 0.81)
  Top 0.61: 234.95,50.16 237.49,50.16 241.3,46.67 241.3,41.27 v241.94,40.64
  Bottom 0.61: v241.94,40.64 242.57,40.01 Q3.1
S$14  (via drill 0.6 pad 0.81)
  Top 0.61: v128.27,53.34 163.83,53.34 172.72,62.23 189.87,62.23 201.93,50.16 205.74,50.16
  Bottom 0.61: U1.28 90.17,44.45 88.26,46.35 88.26,48.9 113.66,48.9 115.57,50.8 118.11,50.8 120.65,53.34 v128.27,53.34
S$15
  Top 0.61: IC1.1 180.34,51.49
S$16  (via drill 0.6 pad 0.81)
  Top 0.61: U1.27 97.79,41.91 99.69,43.81 v107.31,43.81 | v128.27,50.8 175.26,50.8 175.9,50.16 180.97,50.16
  Bottom 0.61: v107.31,43.81 109.22,43.81 109.85,44.45 113.03,44.45 116.84,48.26 119.38,48.26 121.92,50.8 v128.27,50.8
S$17  (via drill 0.6 pad 0.81)
  Top 0.61: U1.30 95.88,48.9 104.78,48.9 v106.04,47.62 | v106.04,40.64 111.76,34.92 121.28,34.92 125.09,38.73 125.09,46.99 v156.84,46.99
  Bottom 0.61: L.2 311.15,40.64 297.81,53.98 177.8,53.98 170.81,46.99 v156.84,46.99 | v106.04,47.62 v106.04,40.64
S$19  (via drill 0.6 pad 0.81)
  Top 0.61: 259.71,50.16 257.18,50.16 256.54,49.53 256.54,44.45 v260.35,40.64
  Bottom 0.61: v260.35,40.64 267.97,33.02 Q1.1
S$20
  Top 0.61: 259.08,47.62 260.99,47.62 263.52,45.09 280.67,45.09 293.37,32.38 Q6.1
S$21  (via drill 0.5 pad 0.25, 0.6 pad 0.81)
  Top 0.406: R10.P$2 U1.5
  Top 0.61: v149.54,68.58 161.29,68.58 166.37,73.66 v172.09,73.66 | v63.5,55.24 74.3,55.24 76.84,57.78 v106.68,57.78
  Bottom 0.61: v172.09,73.66 232.41,73.66 E$2.2 | R10.P$2 50.8,41.27 53.34,43.81 54.61,43.81 55.24,44.45 55.24,52.07 58.42,55.24 v63.5,55.24 | v106.68,57.78 111.76,57.78 113.66,59.69 117.47,59.69 120.01,62.23 142.88,62.23 145.73,65.09 145.73,68.58 v149.54,68.58
S$22
  Top 1.143: 3.1 3.2
  Bottom 1.143: C3.+ 237.49,22.86 242.57,17.78 3.1
S$25  (via drill 0.5 pad 0.25, 0.6 pad 0.81)
  Top 0.61: v105.41,53.98 78.74,53.98 76.2,51.44 v65.72,51.44 | v148.91,64.77 163.19,64.77 168.28,69.85 v176.53,69.85
  Bottom 0.61: v148.91,64.77 148.59,64.77 148.59,64.14 142.88,58.42 120.01,58.42 117.47,55.88 114.3,55.88 112.4,53.98 v105.41,53.98 | v65.72,51.44 60.33,51.44 59.05,50.16 59.05,41.91 57.15,40.01 57.15,35.56 U1.3 | v176.53,69.85 236.22,69.85 E$2.5

## Text on the board
Dimension: MUSICAL | 24v | GND | GND | 12v | - | + | - | - | + | GND | 24v | ROBOTS | +